# EAGLE board IoTKitV3th (EAGLE 9.2.0)
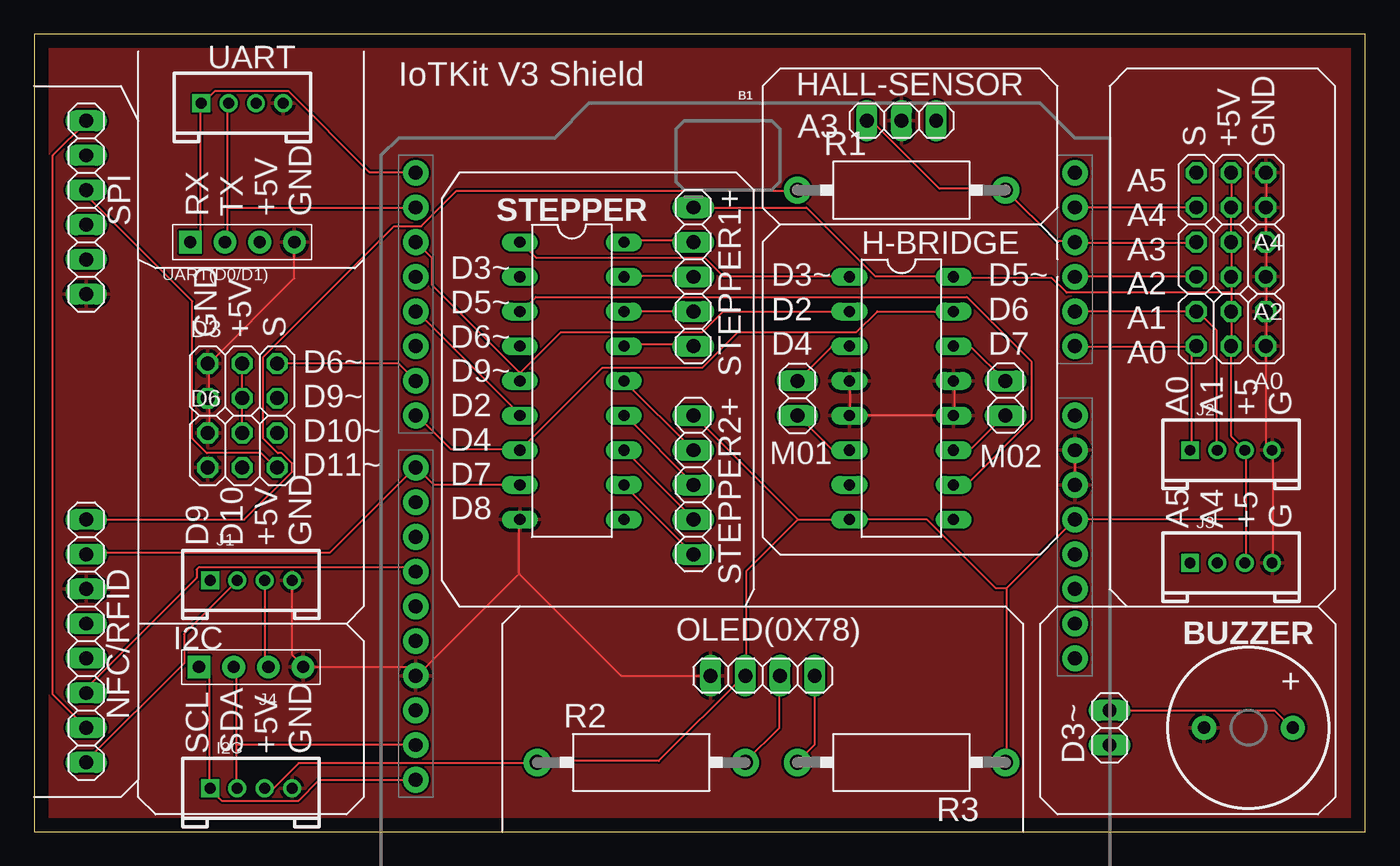
[diagram p0: board, top side]
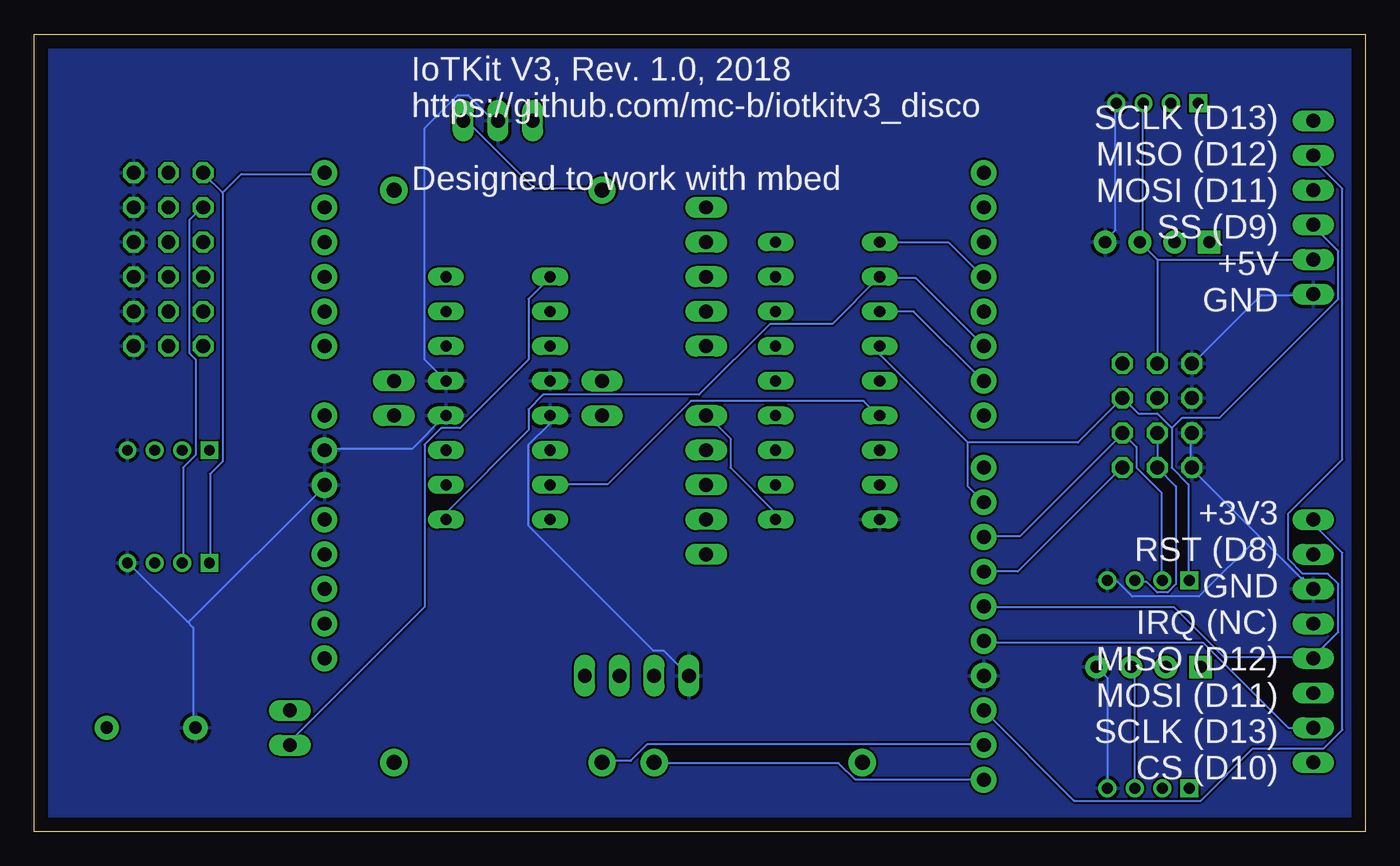
[diagram p1: board, bottom side, seen from below]

Size 97.46 x 58.41 mm. Coordinates in mm from the lower left corner, seen from the top.
Outline: 0,0 97.46,0 97.46,58.41 0,58.41 0,0
Copper layers (1*16): Top 0.035mm / dielectric 1.5mm / Bottom 0.035mm
Design rules "default": minimum track width 6mil, minimum drill 0.35mm, track to track 6mil, track to pad 6mil, pad to pad 6mil, via to via 6mil, smd to smd 6mil, copper to edge 40mil, drill to drill 6mil, minimum pad ring 10mil, minimum via ring 8mil, stop-mask expansion 4mil, vias tented up to drill 0mil, thermal gap 10mil

## Footprints (pad centres in the part's own frame; a part is rotated, then mirrored left to right if it is on the bottom)
2X03 = drill 1.016 octagon: 1 -2.54,-1.27; 2 -2.54,1.27; 3 0,-1.27; 4 0,1.27; 5 2.54,-1.27; 6 2.54,1.27
UNO_R3_SHIELD_NOLABELS = drill 1.016 pad 1.88: 3.3V 24.13,-3.81; 5V 24.13,-1.27; A0 24.13,11.43; A1 24.13,13.97; A2 24.13,16.51; A3 24.13,19.05; A4 24.13,21.59; A5 24.13,24.13; AREF -24.13,-15.24; D2 -24.13,19.05; D3 -24.13,16.51; D4 -24.13,13.97; D5 -24.13,11.43; D6 -24.13,8.89; D7 -24.13,6.35; D8 -24.13,2.54; D9 -24.13,0; D10 -24.13,-2.54; D11 -24.13,-5.08; D12 -24.13,-7.62; D13 -24.13,-10.16; GND@0 24.13,1.27; GND@1 24.13,3.81; GND@2 -24.13,-12.7; IOREF 24.13,-8.89; NC 24.13,-11.43; RES 24.13,-6.35; RX -24.13,24.13; SCL -24.13,-20.32; SDA -24.13,-17.78; TX -24.13,21.59; VIN 24.13,6.35
BUZZER-12MM = drill 0.9 pad 1.778: + 3.25,0; - -3.25,0
1X02 = drill 1.016 long: 1 -1.27,0; 2 1.27,0
DIL16 = drill 0.813 long: 1 -8.89,-3.81; 2 -6.35,-3.81; 3 -3.81,-3.81; 4 -1.27,-3.81; 5 1.27,-3.81; 6 3.81,-3.81; 7 6.35,-3.81; 8 8.89,-3.81; 9 8.89,3.81; 10 6.35,3.81; 11 3.81,3.81; 12 1.27,3.81; 13 -1.27,3.81; 14 -3.81,3.81; 15 -6.35,3.81; 16 -8.89,3.81
1X03 = drill 1.016 long: 1 -2.54,0; 2 0,0; 3 2.54,0
HW4-2.0 = drill 0.8 pad 1.27 square: 1 -3,0 | drill 0.8 pad 1.27: 2 -1,0; 3 1,0; 4 3,0
H4-2.54 = drill 0.889 pad 1.651 square: 1 0,3.81 | drill 0.889 pad 1.651: 2 0,1.27; 3 0,-1.27; 4 0,-3.81
1X08 = drill 1.016 long: 1 -8.89,0; 2 -6.35,0; 3 -3.81,0; 4 -1.27,0; 5 1.27,0; 6 3.81,0; 7 6.35,0; 8 8.89,0
1X04 = drill 1.016 long: 1 -3.81,0; 2 -1.27,0; 3 1.27,0; 4 3.81,0
CA0001 = drill 1.1 pad 2: 1 -7.62,0; 2 7.62,0
1X06 = drill 1.016 long: 1 -6.35,0; 2 -3.81,0; 3 -1.27,0; 4 1.27,0; 5 3.81,0; 6 6.35,0
DIL18 = drill 0.813 long: 1 -10.16,-3.81; 2 -7.62,-3.81; 3 -5.08,-3.81; 4 -2.54,-3.81; 5 0,-3.81; 6 2.54,-3.81; 7 5.08,-3.81; 8 7.62,-3.81; 9 10.16,-3.81; 10 10.16,3.81; 11 7.62,3.81; 12 5.08,3.81; 13 2.54,3.81; 14 0,3.81; 15 -2.54,3.81; 16 -5.08,3.81; 17 -7.62,3.81; 18 -10.16,3.81
1X05 = drill 1.016 long: 1 -5.08,0; 2 -2.54,0; 3 0,0; 4 2.54,0; 5 5.08,0

## Placement (x,y rotation side)
A0  [2X03]  87.63,36.83 180 top
A2  [2X03]  87.63,41.91 180 top
A4  [2X03]  87.63,46.99 180 top
B1  ARDUINO_UNO_R3_SHIELDNOLABELS  [UNO_R3_SHIELD_NOLABELS]  52.07,24.13 0 top
BUZZER  BUZZER-PTH  [BUZZER-12MM]  88.9,7.62 0 top
D3  [2X03]  15.24,33.02 0 top
D3~  [1X02]  78.74,7.62 90 top
D6  [2X03]  15.24,27.94 0 top
H-BRIDGE  L293E  [DIL16]  63.5,31.75 270 top
HALL-SENSOR  [1X03]  63.5,52.07 0 top
I2C  4P-2.0  [HW4-2.0]  15.88,3.17 0 top
J1  4P-2.0  [HW4-2.0]  15.88,18.41 0 top
J2  4P-2.0  [HW4-2.0]  87.63,27.94 0 top
J3  4P-2.0  [HW4-2.0]  87.63,19.68 0 top
J4  4p-2.54  [H4-2.54]  15.88,12.06 90 top
M01  [1X02]  55.88,31.75 90 top
M02  [1X02]  71.12,31.75 270 top
NFC/RFID  [1X08]  3.81,13.97 90 top
OLED(0X78)  [1X04]  53.34,11.43 0 top
R1  10k7  [CA0001]  63.5,46.99 0 top
R2  4k7  [CA0001]  44.45,5.08 0 top
R3  4k7  [CA0001]  63.5,5.08 180 top
SPI  [1X06]  3.81,45.72 90 top
STEPPER  [DIL18]  39.37,33.02 270 top
STEPPER1+  [1X05]  48.26,40.64 270 top
STEPPER2+  [1X05]  48.26,25.4 270 top
UART  4P-2.0  [HW4-2.0]  15.24,53.34 0 top
UART(D0/D1)  UART  [H4-2.54]  15.24,43.18 90 top

## Library data of the parts
A0 A2 A4 D3 D3~ D6 HALL-SENSOR M01 M02 NFC/RFID OLED(0X78) SPI STEPPER1+ STEPPER2+ = pinhead
B1 = SparkFun-Boards
BUZZER = SparkFun-Electromechanical; PROD_ID: COMP-08253; SF_SKU: COM-07950
H-BRIDGE = texas; MF: Arrow Electronics; MPN: L293E; OC_FARNELL: 1467711; OC_NEWARK: 89K0732
I2C J1-J3 UART = Seeed-Connector
J4 UART(D0/D1) = Seeed-Connector; MPN: P125-1104A0BS116A1
R1-R3 = resistor-power; OC_FARNELL: unknown; OC_NEWARK: unknown
STEPPER = SparkFun-IC-Special-Function

## Nets
+3V3: B1.AREF HALL-SENSOR.3 NFC/RFID.8 R1.1
+5V: A0.3 A0.4 A2.3 A2.4 A4.3 A4.4 B1.5V D3.3 D3.4 D6.3 D6.4 H-BRIDGE.8 H-BRIDGE.16 I2C.3 J1.3 J2.3 J3.3 J4.3 OLED(0X78).2 R2.1 R3.1 SPI.2 STEPPER1+.1 STEPPER2+.1 STEPPER.10 UART(D0/D1).3 UART.3
A0: A0.6 B1.A0 J2.1
A1: A0.5 B1.A1 J2.2
A2: A2.6 B1.A2
A3: A2.5 B1.A3 HALL-SENSOR.1 R1.2
A4: A4.6 B1.A4 J3.2
A5: A4.5 B1.A5 J3.1
D2: B1.D2 H-BRIDGE.2 STEPPER.5
D3: B1.D3 D3~.1 H-BRIDGE.1 STEPPER.1
D4: B1.D4 H-BRIDGE.7 STEPPER.6
D5: B1.D5 H-BRIDGE.9 STEPPER.2
D6: B1.D6 D3.6 H-BRIDGE.10 STEPPER.3
D7: B1.D7 H-BRIDGE.15 STEPPER.7
D8: B1.D8 NFC/RFID.7 STEPPER.8
D9: B1.D9 D3.5 J1.1 SPI.3 STEPPER.4
D10: B1.D10 D6.6 J1.2 NFC/RFID.1
D11: B1.D11 D6.5 NFC/RFID.3 SPI.4
D12: B1.D12 NFC/RFID.4 SPI.5
D13: B1.D13 NFC/RFID.2 SPI.6
GND: A0.1 A0.2 A2.1 A2.2 A4.1 A4.2 B1.GND@0 B1.GND@1 B1.GND@2 BUZZER.- D3.1 D3.2 D6.1 D6.2 H-BRIDGE.4 H-BRIDGE.5 H-BRIDGE.12 H-BRIDGE.13 HALL-SENSOR.2 I2C.4 J1.4 J2.4 J3.4 J4.4 NFC/RFID.6 OLED(0X78).1 SPI.1 STEPPER.9 UART(D0/D1).4 UART.4
M01: H-BRIDGE.6 M01.1
N$1: STEPPER2+.2 STEPPER.14
N$2: STEPPER2+.3 STEPPER.13
N$3: STEPPER2+.4 STEPPER.12
N$4: STEPPER2+.5 STEPPER.11
N$5: BUZZER.+ D3~.2
N$30: STEPPER1+.2 STEPPER.18
N$31: STEPPER1+.3 STEPPER.17
N$32: STEPPER1+.4 STEPPER.16
N$33: STEPPER1+.5 STEPPER.15
N$38: H-BRIDGE.14 M02.1
N$39: H-BRIDGE.11 M02.2
N$40: H-BRIDGE.3 M01.2
RX: B1.RX UART(D0/D1).1 UART.1
SCL: B1.SCL I2C.1 J4.1 OLED(0X78).3 R2.2
SDA: B1.SDA I2C.2 J4.2 OLED(0X78).4 R3.2
TX: B1.TX UART(D0/D1).2 UART.2

## Tracks (layer width: path | path; a pad name or v marks a point on that pad's centre or on a via)
+3V3
  Top 0.152: NFC/RFID.8 15.39,22.86 18.9,26.36 18.9,26.98 18.14,27.74 17.83,27.74 16.76,28.8 16.76,34.75 26.36,44.35 28.35,44.35 30.94,46.94 55.78,46.94 R1.1
  Bottom 0.152: HALL-SENSOR.3 65.99,51.97 65.68,51.97 60.81,47.09 55.93,47.09 R1.1 | NFC/RFID.8 3.81,22.55 1.68,20.42 1.68,7.47 3.05,6.1 8.23,6.1 12.04,2.29 21.34,2.29 B1.AREF
+5V
  Top 0.152: J1.3 16.92,18.29 16.92,12.34 17.07,12.19 J4.3 | D6.4 D3.3 D3.4 | 55.93,22.86 H-BRIDGE.8 65.38,22.86 70.41,17.83 71.17,17.83 | 55.93,22.86 48.31,30.48 STEPPER2+.1 | 55.93,22.86 52.12,19.05 52.12,11.43 OLED(0X78).2 51.97,11.43 45.72,5.18 36.88,5.18 R2.1 36.73,5.03 19.36,5.03 17.53,3.2 16.92,3.2 I2C.3 | STEPPER1+.1 56.54,45.72 61.57,40.69 67.21,40.69 H-BRIDGE.16 67.36,40.54 74.52,40.54 75.59,39.47 87.63,39.47 | A4.3 A4.4 A2.3 A2.4 87.63,39.47 | 87.63,39.47 A0.3 A0.4 87.63,28.96 88.54,28.04 J2.3 88.7,27.89 88.7,22.86 | 88.7,22.86 88.7,19.81 J3.3 | 88.7,22.86 B1.5V 71.17,17.83 | 71.17,17.83 71.17,5.18 R3.1
  Bottom 0.152: I2C.3 16.92,3.2 16.92,11.89 17.07,12.04 J4.3 | D6.4 D6.3 13.87,25.3 13.87,18.14 14.48,17.53 15.24,17.53 16,18.29 16.76,18.29 J1.3 | UART.3 16.31,53.34 16.31,43.43 16.46,43.28 UART(D0/D1).3 15.24,41.91 | 15.24,41.91 SPI.2 | 15.24,41.91 D3.4 | STEPPER.10 43.28,22.86 43.28,23.47 46.48,26.67 46.48,28.8 48.16,30.48 STEPPER2+.1
A0
  Top 0.152: 84.73,35.2 84.73,28.04 J2.1 | 84.73,35.2 A0.6 85.04,35.51 | 84.73,35.2 84.43,35.51 76.2,35.51 B1.A0
A1
  Top 0.152: J2.2 86.56,28.04 86.56,36.73 85.19,38.1 A0.5 B1.A1
A2
  Top 0.152: A2.6 85.04,40.69 76.2,40.69 B1.A2
A3
  Top 0.152: A2.5 85.04,43.13 76.2,43.13 B1.A3 76.2,43.28 74.83,43.28 R1.2 71.02,47.09 66.29,47.09 61.42,51.97 60.96,51.97 HALL-SENSOR.1
A4
  Top 0.152: A4.6 B1.A4
  Bottom 0.152: J3.2 86.56,19.81 86.56,26.67 85.65,27.58 85.65,34.59 86.11,35.05 86.11,44.81 85.19,45.72 A4.6
A5
  Bottom 0.152: 83.67,46.79 83.67,27.13 84.58,26.21 84.58,19.81 J3.1 | 83.67,46.79 85.04,48.16 A4.5 | 83.67,46.79 82.3,48.16 76.2,48.16 B1.A5
D2
  Top 0.152: 35.51,33.53 35.51,33.68 29.11,40.08 29.11,42.06 28.04,43.13 B1.D2 | 35.51,33.53 35.51,33.07 STEPPER.5 35.51,33.53 | H-BRIDGE.2 50.44,38.1 48.92,36.58 38.56,36.58 35.51,33.53
D3
  Top 0.152: H-BRIDGE.1 59.59,40.69 50.44,40.69 49.07,42.06 36.73,42.06 35.66,43.13 STEPPER.1
  Bottom 0.152: STEPPER.1 35.51,43.13 30.48,43.13 28.04,40.69 B1.D3 | D3~.1 78.64,6.4 78.64,6.71 68.89,16.46 68.89,28.35 67.67,29.57 66.29,29.57 61.27,34.59 61.27,39.01 59.74,40.54 H-BRIDGE.1
D4
  Top 0.152: B1.D4 28.04,38.1 35.66,30.48 STEPPER.6
  Bottom 0.152: H-BRIDGE.7 59.59,25.45 55.47,25.45 49.38,31.55 36.73,31.55 35.66,30.48 STEPPER.6
D5
  Bottom 0.152: B1.D5 32.92,40.54 35.51,40.54 STEPPER.2 39.01,37.19 43.59,37.19 48.77,32 60.2,32 61.27,30.94 61.27,29.41 67.21,23.47 67.21,22.86 H-BRIDGE.9
D6
  Top 0.152: H-BRIDGE.10 67.36,25.45 68.28,25.45 73,30.18 73,34.44 68.28,39.17 36.73,39.17 35.66,38.1 STEPPER.3 | D3.6 26.67,34.29 B1.D6
  Bottom 0.152: STEPPER.3 33.07,38.1 28.04,33.07 B1.D6
D7
  Top 0.152: B1.D7 28.04,30.48 30.48,28.04 35.51,28.04 STEPPER.7 41.6,33.98 48.92,33.98 51.51,36.58 60.2,36.58 61.72,38.1 H-BRIDGE.15
D8
  Top 0.152: STEPPER.8 35.51,25.45 29.26,25.45 28.04,26.67 B1.D8 27.89,26.67 21.64,20.42 3.81,20.42 NFC/RFID.7
D9
  Bottom 0.152: 29.11,28.5 35.51,34.9 35.51,35.51 STEPPER.4 | 29.11,28.5 29.11,25.3 B1.D9 | 14.17,29.57 14.17,26.67 12.95,25.45 12.95,18.44 J1.1 | 14.17,29.57 15.24,30.63 16.61,30.63 17.68,31.7 D3.5 21.03,28.5 29.11,28.5 | 14.17,29.57 13.41,30.33 10.67,30.33 1.98,39.01 1.98,42.52 3.81,44.35 SPI.3
D10
  Top 0.152: NFC/RFID.1 3.81,5.18 10.97,12.34 10.97,14.48 14.78,18.29 J1.2
  Bottom 0.152: J1.2 14.94,18.44 14.94,24.84 16.76,26.67 16.76,28.19 D6.6 17.83,29.11 25.3,21.64 27.89,21.64 B1.D10
D11
  Top 0.152: NFC/RFID.3 3.81,10.52 11.89,18.59 11.89,19.2 12.04,19.36 27.58,19.36 27.89,19.05 B1.D11 | SPI.4 3.81,46.63 11.58,38.86 11.58,28.8 12.65,27.74 16.61,27.74 17.68,26.67 D6.5
  Bottom 0.152: B1.D11 25.45,19.05 17.83,26.67 D6.5
D12
  Bottom 0.152: 3.81,12.8 10.36,12.8 14.02,16.46 27.89,16.46 B1.D12 | SPI.5 3.81,49.23 1.68,47.09 1.68,27.28 5.64,23.32 5.64,19.96 4.57,18.9 2.74,18.9 1.98,18.14 1.98,14.63 3.81,12.8 | 3.81,12.8 NFC/RFID.4
D13
  Top 0.152: NFC/RFID.2 1.37,10.06 1.37,49.53 3.81,51.97 SPI.6
  Bottom 0.152: NFC/RFID.2 5.64,7.62 11.89,13.87 27.89,13.87 B1.D13
GND
  Top 0.152: B1.GND@1 B1.GND@0 | 59.74,30.48 59.74,32.92 H-BRIDGE.4 | H-BRIDGE.13 67.36,32.92 67.36,30.48 H-BRIDGE.12 59.74,30.48 | 59.74,30.48 H-BRIDGE.5 | 90.22,45.72 90.22,48.16 A4.1 | 90.22,38.1 90.22,35.66 A0.2 90.22,35.51 90.22,28.35 90.53,28.04 J2.4 90.68,27.89 90.68,19.81 J3.4 | 90.22,38.1 90.22,40.54 A2.2 90.22,40.69 90.22,43.13 A2.1 90.22,43.28 90.22,45.72 | 90.22,38.1 A0.1 | 90.22,45.72 A4.2 | J1.4 18.9,18.29 18.9,12.95 19.66,12.19 J4.4 19.81,12.04 27.28,12.04 27.89,11.43 B1.GND@2 28.04,11.43 35.51,18.9 | 35.51,18.9 35.51,22.86 STEPPER.9 | OLED(0X78).1 42.98,11.43 35.51,18.9 | D6.2 12.8,29.26 12.8,31.7 D3.1 12.8,31.85 12.8,34.29 | UART(D0/D1).4 19.05,40.54 12.8,34.29 | 12.8,34.29 D3.2
  Bottom 0.152: H-BRIDGE.13 68.89,34.59 68.89,51.51 66.45,53.95 65.68,53.95 63.86,52.12 63.55,52.12 HALL-SENSOR.2 | B1.GND@1 76.2,28.04 69.8,28.04 67.36,30.48 H-BRIDGE.12 | 86.26,15.39 90.53,19.66 J3.4 | 86.26,15.39 85.8,14.94 85.8,7.62 BUZZER.- | 86.26,15.39 86.11,15.39 76.2,25.3 B1.GND@0 | J4.4 18.9,11.28 18.9,3.2 I2C.4 | 12.8,26.67 7.77,21.64 | 7.77,21.64 4.72,18.59 4.57,18.59 3.81,17.83 NFC/RFID.6 | UART.4 18.29,53.34 18.29,44.04 19.05,43.28 UART(D0/D1).4 | SPI.1 3.81,39.32 7.62,39.32 12.65,34.29 D3.2 | 12.8,26.67 12.8,29.11 D6.2 | 12.8,26.67 D6.1 | 7.77,21.64 12.19,17.22 17.07,17.22 18.14,18.29 18.75,18.29 J1.4 | OLED(0X78).1 51.36,13.26 52.12,13.26 61.27,22.4 61.27,28.35 59.74,29.87 59.74,30.48 H-BRIDGE.5
  pour Bottom: 0,58.42 0,0 97.79,0 97.79,58.42
  pour Top: 0,58.42 0,-1.27 97.79,-1.27 97.79,59.69 1.27,59.69
M01
  Top 0.152: H-BRIDGE.6 59.59,28.04 58.37,28.04 55.93,30.48 M01.1
N$1
  Top 0.152: STEPPER2+.2 STEPPER.14
N$2
  Top 0.152: STEPPER.13 43.28,30.48 48.31,25.45 STEPPER2+.3
N$3
  Top 0.152: STEPPER.12 43.28,27.89 48.31,22.86 STEPPER2+.4
N$4
  Top 0.152: STEPPER2+.5 STEPPER.11
N$5
  Top 0.152: D3~.2 78.79,8.84 90.83,8.84 92.05,7.62 BUZZER.+
N$30
  Top 0.152: STEPPER.18 43.28,43.28 48.16,43.28 STEPPER1+.2
N$31
  Top 0.152: STEPPER.17 43.28,40.69 48.16,40.69 STEPPER1+.3
N$32
  Top 0.152: STEPPER1+.4 STEPPER.16
N$33
  Top 0.152: STEPPER.15 43.28,35.66 48.16,35.66 STEPPER1+.5
N$38
  Top 0.152: H-BRIDGE.14 67.36,35.51 68.58,35.51 71.02,33.07 M02.1
N$39
  Top 0.152: H-BRIDGE.11 67.36,28.04 68.58,28.04 71.02,30.48 M02.2
N$40
  Top 0.152: M01.2 58.37,35.51 59.59,35.51 H-BRIDGE.3
RX
  Top 0.152: UART(D0/D1).1 11.43,43.28 12.19,44.04 12.19,53.34 UART.1 12.34,53.34 13.26,54.25 18.59,54.25 24.54,48.31 27.89,48.31 B1.RX
SCL
  Top 0.152: OLED(0X78).3 54.56,11.43 54.56,7.62 52.12,5.18 R2.2 | J4.1 12.19,12.04 12.8,11.43 12.8,3.2 I2C.1 12.95,3.05 13.72,2.29 19.36,2.29 20.88,3.81 B1.SCL
  Bottom 0.152: B1.SCL 37.34,3.81 38.56,5.03 51.97,5.03 R2.2
SDA
  Top 0.152: OLED(0X78).4 57.15,6.4 55.93,5.18 R3.2 | 14.78,6.4 14.78,11.89 J4.2 | 14.78,6.4 14.78,3.2 I2C.2 | 14.78,6.4 27.89,6.4 B1.SDA
  Bottom 0.152: R3.2 55.78,5.18 53.8,5.18 52.58,6.4 28.04,6.4 B1.SDA
TX
  Top 0.152: 14.17,45.72 14.17,43.43 14.02,43.28 UART(D0/D1).2 | 14.17,45.72 14.17,53.34 UART.2 | 14.17,45.72 B1.TX

## Text on the board
tNames: IoTKit V3 Shield | A3 | S / +5V / GND | RX / TX / +5V / GND | GND / +5V / S | D3~ / D2 / D4 | D5~ / D6 / D7 | A5 / A4 / A3 / A2 / A1 / A0 | A0 / A1 / +5 / G | D6~ / D9~ / D10~ / D11~ | D3~ / D5~ / D6~ / D9~ / D2 / D4 / D7 / D8 | A5 / A4 / +5 / G | D9 / D10 / +5V / GND | I2C | + | SCL / SDA / +5V / GND
bNames: IoTKit V3, Rev. 1.0, 2018 / https://github.com/mc-b/iotkitv3_disco / / Designed to work with mbed | SCLK (D13) / MISO (D12) / MOSI (D11) / SS (D9) / +5V / GND | +3V3 / RST (D8) / GND / IRQ (NC) / MISO (D12) / MOSI (D11) / SCLK (D13) / CS (D10)